# EAGLE board PD_Filter_Amp (EAGLE 9.7.0)
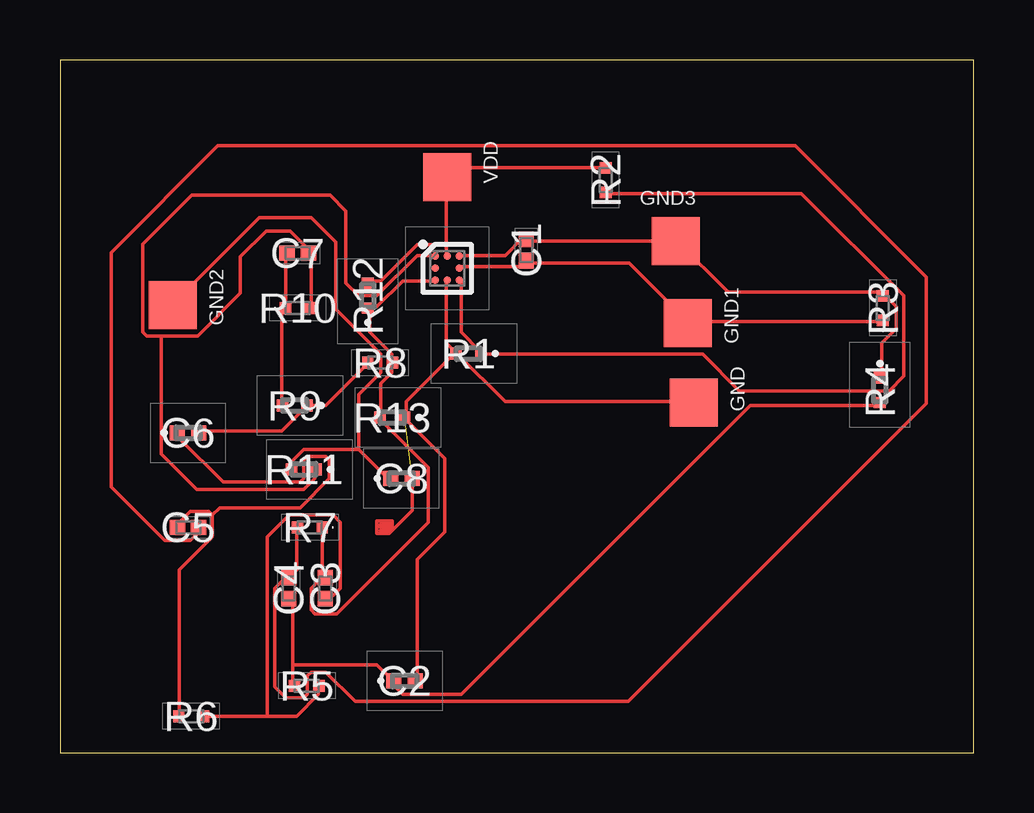
[diagram p0: board, top side]

Size 38.08 x 28.88 mm. Coordinates in mm from the lower left corner, seen from the top.
Outline: 0,0 38.08,0 38.08,28.88 0,28.88 0,0
Copper layers (1*16): Top / Bottom
Stack-up Default Layer Stack: Top User Defined 0.035mm / Dielectric-1 User Defined 1.5mm / Bottom User Defined 0.035mm
Design rules "default": minimum track width 6mil, minimum drill 0.35mm, track to track 6mil, track to pad 6mil, pad to pad 6mil, via to via 6mil, smd to smd 6mil, copper to edge 40mil, drill to drill 6mil, minimum pad ring 10mil, minimum via ring 8mil, stop-mask expansion 4mil, vias tented up to drill 0mil, thermal gap 10mil

## Footprints (pad centres in the part's own frame; a part is rotated, then mirrored left to right if it is on the bottom)
CAPC1005X55N = smd 0.65 x 0.62: 1 -0.44,0; 2 0.44,0
C0402 = smd 0.62 x 0.62: 1 -0.45,0; 2 0.45,0
PAD = smd 2 x 2: PAD 0,0
BGA8C50P3X3_142X142X65 = smd 0.306 x 0.306: A1 -0.5,0.5; A2 0,0.5; A3 0.5,0.5; B1 -0.5,0; B3 0.5,0; C1 -0.5,-0.5; C2 0,-0.5; C3 0.5,-0.5
ERJPA2_(0402) = smd 0.475 x 0.5: 1 -0.512,0; 2 0.512,0
ERJ2RKD1004X = smd 0.475 x 0.5: 1 -0.512,0; 2 0.512,0
ERJS02_U02_(0402) = smd 0.475 x 0.5: 1 -0.512,0; 2 0.512,0

## Placement (x,y rotation side)
C1  CAPACITOR-270PF  [CAPC1005X55N]  19.43,20.96 90 top
C2  CAPACITOR-10µF  [C0402]  14.36,2.99 0 top
C3  CAPACITOR-0.22µF  [CAPC1005X55N]  11.05,6.86 90 top
C4  CAPACITOR-0.1µF  [CAPC1005X55N]  9.53,6.86 90 top
C5  CAPACITOR-0.1µF  [CAPC1005X55N]  5.33,9.4 180 top
C6  CAPACITOR-3.3µF  [C0402]  5.33,13.34 0 top
C7  CAPACITOR-5600PF  [CAPC1005X55N]  9.91,20.83 0 top
C8  CAPACITOR-10µF  [C0402]  14.22,11.43 0 top
GND  PAD  [PAD]  26.42,14.61 270 top
GND1  PAD  [PAD]  26.16,17.91 270 top
GND2  PAD  [PAD]  4.7,18.67 270 top
GND3  PAD  [PAD]  25.65,21.34 0 top
IC1  ADA4505-2  [BGA8C50P3X3_142X142X65]  16.13,20.19 0 top
R1  RESISTOR-1.2KOHM  [ERJPA2_(0402)]  17.02,16.64 180 top
R2  RESISTOR-14KOHM  [ERJ2RKD1004X]  22.73,23.88 90 top
R3  RESISTOR-4.7MOHM  [ERJ2RKD1004X]  34.29,18.54 90 top
R4  RESISTOR-2.7KOHM  [ERJPA2_(0402)]  34.16,15.11 270 top
R5  RESISTOR-27KOHM  [ERJ2RKD1004X]  10.29,2.79 0 top
R6  RESISTOR-27KOHM  [ERJ2RKD1004X]  5.46,1.52 180 top
R7  RESISTOR-14KOHM  [ERJ2RKD1004X]  10.41,9.4 180 top
R8  RESISTOR-56KOHM  [ERJ2RKD1004X]  13.34,16.26 0 top
R9  RESISTOR-150KOHM  [ERJS02_U02_(0402)]  9.78,14.47 180 top
R10  RESISTOR-4.7MOHM  [ERJ2RKD1004X]  9.91,18.54 0 top
R11  RESISTOR-3.3KOHM  [ERJPA2_(0402)]  10.16,11.81 180 top
R12  RESISTOR-3.3KOHM  [ERJPA2_(0402)]  12.83,19.05 90 top
R13  RESISTOR-3.3KOHM  [ERJPA2_(0402)]  13.84,13.97 180 top
VDD  PAD  [PAD]  16.13,24 270 top

## Library data of the parts
C1 = MABOS_Library; DESCRIPTION: SMD Comm C0G, Ceramic, 270 pF, 2%, 50 VDC, 125 VDC, 125C, -55C, C0G, SMD, MLCC, Ultra-Stable, Low Loss, Class I, 0.1 % , 100 GOhms, 1.06 mg, 0402, 1mm, 0.5mm, 0.5mm, 0.3mm, 0.3mm, 10000, 78 Weeks, 120; HEIGHT: 0.55mm; MANUFACTURER_NAME: KEMET; MANUFACTURER_PART_NUMBER: C0402C271G5GACTU; MOUSER_PART_NUMBER: 80-C0402C271G5G; MOUSER_PRICE-STOCK: https://www.mouser.com/Search/Refine.aspx?Keyword=80-C0402C271G5G
C2 C8 = MABOS_Library; DESCRIPTION: SMD Comm X5R, Ceramic, 10 uF, 20%, 6.3 VDC, 15.75 VDC, 85C, -55C, X5R, SMD, MLCC, Temperature Stable, Class II, 10 % , 10 MOhms, 1.41 mg, 0402, 1mm, 0.5mm, 0.5mm, 0.3mm, 0.3mm, 10000, 78 Weeks, 70; HEIGHT: 0.55mm; MANUFACTURER_NAME: KEMET; MANUFACTURER_PART_NUMBER: C0402C106M9PACTU; MOUSER_PART_NUMBER: 80-C0402C106M9P; MOUSER_PRICE-STOCK: https://www.mouser.co.uk/ProductDetail/KEMET/C0402C106M9PACTU?qs=x4XeXhDQKnp%252Bz0lMlwMC3A%3D%3D
C3 = MABOS_Library; DESCRIPTION: SMD Comm X5R, Ceramic, 0.22 uF, 10%, 6.3 VDC, 15.75 VDC, 85C, -55C, X5R, SMD, MLCC, Temperature Stable, Class II, 10 % , 2.2727 GOhms, 1.21 mg, 0402, 1mm, 0.5mm, 0.5mm, 0.3mm, 0.3mm, 10000, 78 Weeks, 70; HEIGHT: 0.55mm; MANUFACTURER_NAME: KEMET; MANUFACTURER_PART_NUMBER: C0402C224K9PACTU; MOUSER_PART_NUMBER: 80-C0402C224K9P; MOUSER_PRICE-STOCK: https://www.mouser.co.uk/ProductDetail/KEMET/C0402C224K9PACTU?qs=RCLU9o6%252BptzyXOocONqIew%3D%3D
C4 C5 = MABOS_Library; DESCRIPTION: SMD Comm X7R, Ceramic, 0.1 uF, 20%, 16 VDC, 40 VDC, 125C, -55C, X7R, SMD, MLCC, Temperature Stable, Class II, 10 % , 5 GOhms, 1.21 mg, 0402, 1mm, 0.5mm, 0.5mm, 0.3mm, 0.3mm, 10000, 78 Weeks, 80; HEIGHT: 0.55mm; MANUFACTURER_NAME: KEMET; MANUFACTURER_PART_NUMBER: C0402C104M4RACTU; MOUSER_PART_NUMBER: 80-C0402C104M4R; MOUSER_PRICE-STOCK: https://www.mouser.co.uk/ProductDetail/KEMET/C0402C104M4RACTU?qs=JZ1tlzCDhS7cY%252B6lsIooCQ%3D%3D
C6 = MABOS_Library; DESCRIPTION: SMD Comm X5R, Ceramic, 3.3 uF, 20%, 4 VDC, 10 VDC, 85C, -55C, X5R, SMD, MLCC, Temperature Stable, Class II, 10 % , 30.3 MOhms, 1.21 mg, 0402, 1mm, 0.5mm, 0.5mm, 0.3mm, 0.3mm, 10000, 78 Weeks, 70; HEIGHT: 0.55mm; MANUFACTURER_NAME: KEMET; MANUFACTURER_PART_NUMBER: C0402C335M7PACTU; MOUSER_PART_NUMBER: 80-C0402C335M7P; MOUSER_PRICE-STOCK: https://www.mouser.co.uk/ProductDetail/KEMET/C0402C335M7PACTU?qs=K%2Fj%2Fqf%252B0fqJuKSSbbJXSEQ%3D%3D
C7 = MABOS_Library; DESCRIPTION: SMD Comm X7R, Ceramic, 5600 pF, 5%, 16 VDC, 40 VDC, 125C, -55C, X7R, SMD, MLCC, Temperature Stable, Class II, 3.5 % , 100 GOhms, 1.21 mg, 0402, 1mm, 0.5mm, 0.5mm, 0.3mm, 0.3mm, 10000, 78 Weeks, 80; HEIGHT: 0.55mm; MANUFACTURER_NAME: KEMET; MANUFACTURER_PART_NUMBER: C0402C562J4RACTU; MOUSER_PART_NUMBER: 80-C0402C562J4R; MOUSER_PRICE-STOCK: https://www.mouser.co.uk/ProductDetail/KEMET/C0402C562J4RACTU?qs=YJD0VjdmSUns5e35Blws8w%3D%3D
GND GND1-GND3 VDD = Nordic_BLE
IC1 = MABOS_Library; DESCRIPTION: ANALOG DEVICES - ADA4505-2ACBZ-R7 - OP-AMP, DUAL, 50KHZ, WLCSP-8; HEIGHT: 0.65mm; MANUFACTURER_NAME: Analog Devices; MANUFACTURER_PART_NUMBER: ADA4505-2ACBZ-R7; MOUSER_PART_NUMBER: 584-ADA4505-2ACBZ-R7; MOUSER_PRICE-STOCK: https://www.mouser.co.uk/ProductDetail/Analog-Devices/ADA4505-2ACBZ-R7?qs=BpaRKvA4VqEsLtXU3NSLDQ%3D%3D
R1 = MABOS_Library; DESCRIPTION: Anti-Surge Thick Film Chip Resistor, 0402, 0.2W; HEIGHT: 0.4mm; MANUFACTURER_NAME: Panasonic; MANUFACTURER_PART_NUMBER: ERJ-PA2D1201X; MOUSER_PART_NUMBER: 667-ERJ-PA2D1201X; MOUSER_PRICE-STOCK: https://www.mouser.com/Search/Refine.aspx?Keyword=667-ERJ-PA2D1201X
R2 R7 = MABOS_Library; DESCRIPTION: Panasonic ERJ2RK Series Thick Film Resistor 14k +/-1% 0.1W +/-100ppm/C; HEIGHT: 0.4mm; MANUFACTURER_NAME: Panasonic; MANUFACTURER_PART_NUMBER: ERJ-2RKF1402X; MOUSER_PART_NUMBER: 667-ERJ-2RKF1402X; MOUSER_PRICE-STOCK: https://www.mouser.com/Search/ProductDetail.aspx?qs=MVjVSMjNRMrMgFTFLdW36A%3d%3d
R3 R10 = MABOS_Library; DESCRIPTION: Panasonic ERJ2GEJ Series Thick Film Surface Mount Fixed Resistor 0402 Case 4.7M +/-5% 0.1W -400 +150ppm/C; HEIGHT: 0.4mm; MANUFACTURER_NAME: Panasonic; MANUFACTURER_PART_NUMBER: ERJ-2GEJ475X; MOUSER_PART_NUMBER: 667-ERJ-2GEJ475X; MOUSER_PRICE-STOCK: https://www.mouser.com/Search/Refine.aspx?Keyword=667-ERJ-2GEJ475X
R4 = MABOS_Library; DESCRIPTION: Anti-Surge Thick Film Chip Resistor, 0402, 0.2W; HEIGHT: 0.4mm; MANUFACTURER_NAME: Panasonic; MANUFACTURER_PART_NUMBER: ERJ-PA2F2701X
R5 R6 = MABOS_Library; DESCRIPTION: Panasonic Precision Thick Film Surface Mount Resistor 0402 Case 27k +/-0.5% 0.063W +/-50ppm/C; HEIGHT: 0.4mm; MANUFACTURER_NAME: Panasonic; MANUFACTURER_PART_NUMBER: ERJ-2RHD2702X; MOUSER_PART_NUMBER: 667-ERJ-2RHD2702X; MOUSER_PRICE-STOCK: https://www.mouser.com/Search/Refine.aspx?Keyword=667-ERJ-2RHD2702X
R8 = MABOS_Library; DESCRIPTION: Precision Thick Film Chip Resistor, 0402, 0.063W; HEIGHT: 0.4mm; MANUFACTURER_NAME: Panasonic; MANUFACTURER_PART_NUMBER: ERJ-2RKF5602X; MOUSER_PART_NUMBER: 667-ERJ-2RKF5602X; MOUSER_PRICE-STOCK: https://www.mouser.com/Search/Refine.aspx?Keyword=667-ERJ-2RKF5602X
R9 = MABOS_Library; DESCRIPTION: Anti-Sulfurated Thick Film Chip Resistor, 0402, 0.1W; HEIGHT: 0.4mm; MANUFACTURER_NAME: Panasonic; MANUFACTURER_PART_NUMBER: ERJ-U02D1503X; MOUSER_PART_NUMBER: 667-ERJ-U02D1503X; MOUSER_PRICE-STOCK: https://www.mouser.com/Search/Refine.aspx?Keyword=667-ERJ-U02D1503X
R11-R13 = MABOS_Library; DESCRIPTION: Anti-Surge Thick Film Chip Resistor, 0402, 0.2W; HEIGHT: 0.4mm; MANUFACTURER_NAME: Panasonic; MANUFACTURER_PART_NUMBER: ERJ-PA2F3301X; MOUSER_PART_NUMBER: 667-ERJ-PA2F3301X; MOUSER_PRICE-STOCK: https://www.mouser.com/Search/Refine.aspx?Keyword=667-ERJ-PA2F3301X

## Nets
+IN_A: IC1.C3 R1.1 R2.1
+IN_B: C3.2 IC1.C1 R7.1 R8.2 R12.1 R13.2
-IN+B: IC1.B1
-IN_B: C7.1 R9.2 R10.1
GND: C2.2 C8.2 GND.PAD IC1.C2 R1.2 R13.1
N$1: C2.1 C4.1 R4.2 R5.1
N$2: C3.1 R5.2 R6.1
N$6: C4.2 C5.1 R7.2
N$7: C5.2 C6.1 R6.2
N$8: C6.2 R8.1 R9.1
OUT_A: C1.2 GND3.PAD IC1.A3 R3.2 R4.1
OUT_B: C7.2 IC1.A1 R10.2 R11.1
PD_IN: C1.1 GND1.PAD IC1.B3 R3.1
PD_OUT: C8.1 GND2.PAD R11.2
VDD: IC1.A2 R2.2 R12.2 VDD.PAD

## Tracks (layer width: path | path; a pad name or v marks a point on that pad's centre or on a via)
+IN_A
  Top 0.152: IC1.C3 16.71,19.66 16.71,17.53 17.48,16.76 R1.1 17.63,16.61 26.77,16.61 28.3,15.09 34.54,15.09 35.15,15.7 35.15,19.05 30.89,23.32 22.81,23.32 R2.1
+IN_B
  Top 0.152: IC1.C1 15.49,19.66 14.28,19.66 13.21,18.59 12.9,18.59 R12.1 12.9,18.44 12.9,17.53 13.82,16.61 13.82,16.31 R8.2 13.82,16.15 13.82,15.85 13.36,15.39 13.36,14.02 R13.2 13.36,13.87 15.34,11.89 15.34,9.6 11.53,5.79 10.62,5.79 10.46,5.94 10.46,6.86 10.77,7.16 10.92,7.16 C3.2 10.92,7.32 10.92,9.3 R7.1
-IN_B
  Top 0.152: R9.2 9.25,14.48 9.25,18.44 R10.1 9.4,18.59 9.4,20.73 C7.1
GND  (1 unrouted)
  Top 0.152: IC1.C2 16.1,19.66 16.1,17.07 16.41,16.76 R1.2 | R1.2 16.41,16.61 14.43,14.63 14.43,14.02 R13.1 14.43,13.87 16.03,12.27 16.03,9.2 14.88,8.05 14.88,3.05 C2.2 | GND.PAD 26.31,14.63 18.54,14.63 16.56,16.61 R1.2 | C8.2 14.67,10.1 13.72,9.14 13.21,9.14 13.21,9.65 13.84,9.65 13.84,9.53 | 13.84,9.53 13.84,9.4 13.34,9.4 13.34,9.53 13.84,9.53 | 13.84,9.53 13.72,9.4 13.72,9.27 13.34,9.27
N$1
  Top 0.152: 9.7,3.66 9.7,6.25 9.55,6.4 C4.1 | 9.7,3.66 9.7,2.9 R5.1 | R4.2 34.09,14.48 28.75,14.48 16.71,2.44 14.28,2.44 13.82,2.9 C2.1 13.82,3.05 13.21,3.66 9.7,3.66
N$2
  Top 0.152: 8.64,1.52 9.86,1.52 10.77,2.44 10.77,2.74 R5.2 | 8.64,1.52 R6.1 | 8.64,1.52 8.64,8.99 9.55,9.91 11.38,9.91 11.68,9.6 11.68,6.86 11.38,6.55 11.07,6.55 C3.1
N$6
  Top 0.152: R7.2 9.86,9.3 9.86,7.62 9.55,7.32 C4.2 9.4,7.32 8.94,6.86 8.94,2.74 9.4,2.29 10.16,2.29 10.31,2.44 10.31,3.2 10.46,3.35 11.07,3.35 12.29,2.13 23.67,2.13 36.09,14.55 36.09,19.84 30.63,25.3 6.58,25.3 2.13,20.85 2.13,11.07 4.37,8.84 5.44,8.84 5.74,9.14 5.74,9.3 C5.1
N$7
  Top 0.152: 6.35,9.91 6.35,8.99 4.98,7.62 4.98,1.52 R6.2 | 6.35,9.91 6.2,10.06 5.44,10.06 4.83,9.45 C5.2 | 6.35,9.91 6.65,10.21 10.01,10.21 11.23,11.43 11.23,12.19 11.07,12.34 10.31,12.34 10.16,12.19 10.16,11.43 10.01,11.28 6.81,11.28 4.98,13.11 4.98,13.26 C6.1
N$8
  Top 0.152: R8.1 12.75,16.15 11.07,14.48 10.31,14.48 R9.1 10.16,14.33 9.25,13.41 5.89,13.41 C6.2
OUT_A
  Top 0.152: R4.1 34.24,15.7 34.24,17.07 34.85,17.68 34.85,18.59 34.39,19.05 R3.2 34.24,19.2 27.84,19.2 25.71,21.34 GND3.PAD 19.46,21.34 C1.2 19.3,21.49 18.54,20.73 16.71,20.73 IC1.A3
OUT_B
  Top 0.152: 4.22,17.37 5.74,17.37 7.52,19.15 7.52,20.68 8.59,21.74 9.6,21.74 10.46,20.88 C7.2 10.46,20.73 10.46,18.59 R10.2 | 4.22,17.37 3.61,17.37 3.45,17.53 3.45,21.21 5.49,23.24 11.25,23.24 11.91,22.58 11.91,19.58 12.45,19.05 13.21,19.05 14.88,20.73 15.49,20.73 IC1.A1 | 4.22,17.37 4.22,12.45 5.69,10.97 10.16,10.97 10.62,11.43 10.62,11.73 R11.1
PD_IN
  Top 0.152: IC1.B3 16.71,20.27 19.15,20.27 19.3,20.42 C1.1 19.46,20.42 23.72,20.42 26.16,17.98 | 26.16,17.98 34.24,17.98 R3.1 | 26.16,17.98 GND1.PAD
PD_OUT
  Top 0.152: 12.45,12.65 10.16,12.65 9.7,12.19 9.7,11.89 R11.2 | 12.45,12.65 13.67,11.43 C8.1 | GND2.PAD 4.7,18.69 8.31,22.3 10.46,22.3 11.48,21.29 11.48,18.49 13.36,16.61 13.36,15.85 12.45,14.94 12.45,12.65
VDD
  Top 0.152: 16.1,21.18 16.1,23.93 VDD.PAD 16.26,24.08 16.56,24.38 22.66,24.38 R2.2 | 16.1,21.18 16.1,20.73 IC1.A2 | 16.1,21.18 14.88,21.18 13.36,19.66 12.9,19.66 R12.2